# Altium PCB PCBA-2121-01.PcbDoc (part 1 of 2)
Units mil, origin at the board's own origin, x right, y up, seen from the top; angles counter-clockwise.
Board outline 748.03 x 2362.2 mil, 4 copper layers (L1, L2, L3, L4), stack 62.192 mil thick; 80 components, 54 nets, 287 pads, 217 vias.
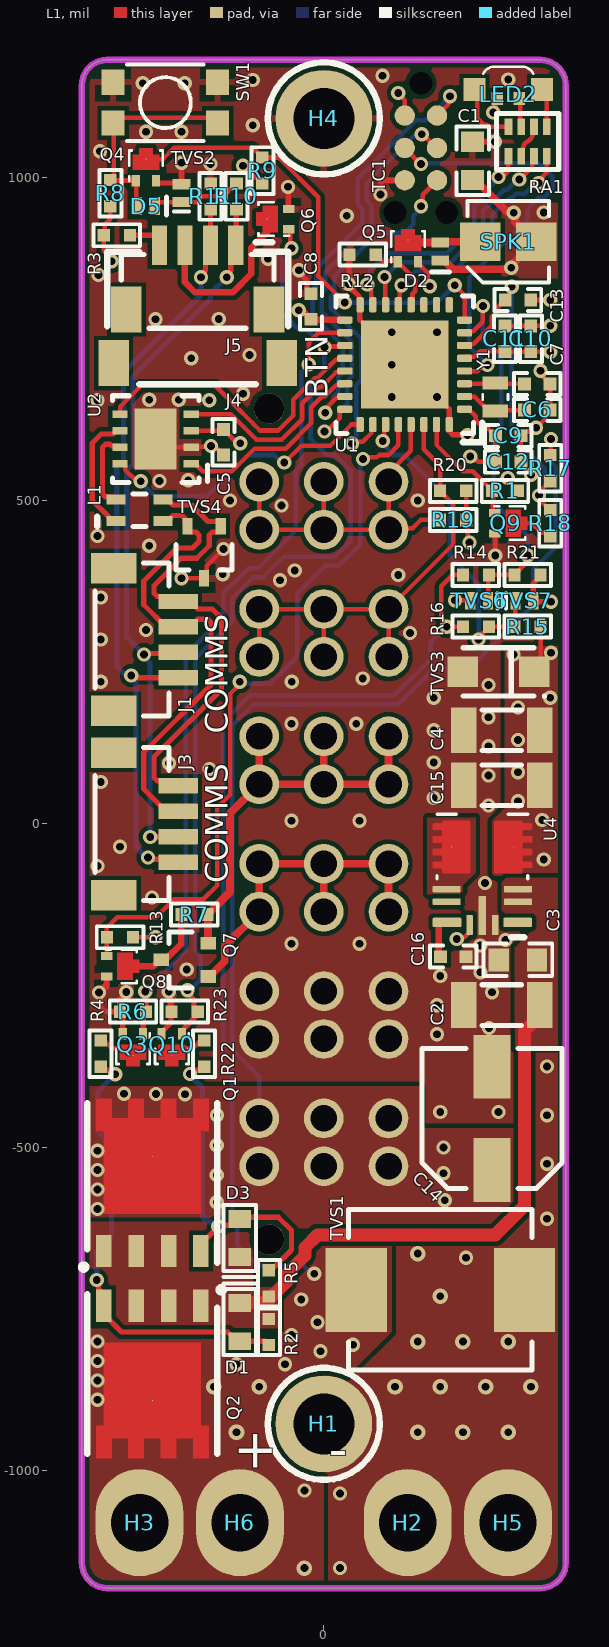
[diagram p0: L1 view]
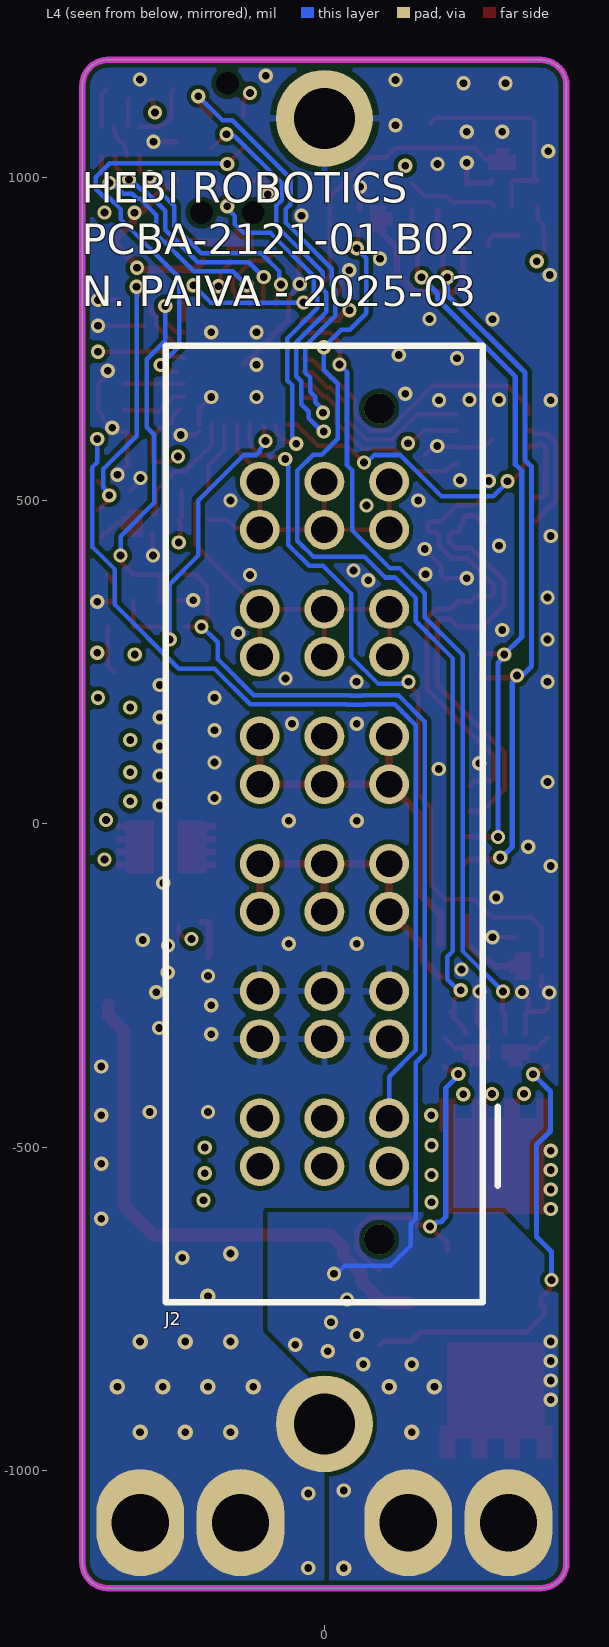
[diagram p1: L4 view, seen from below]
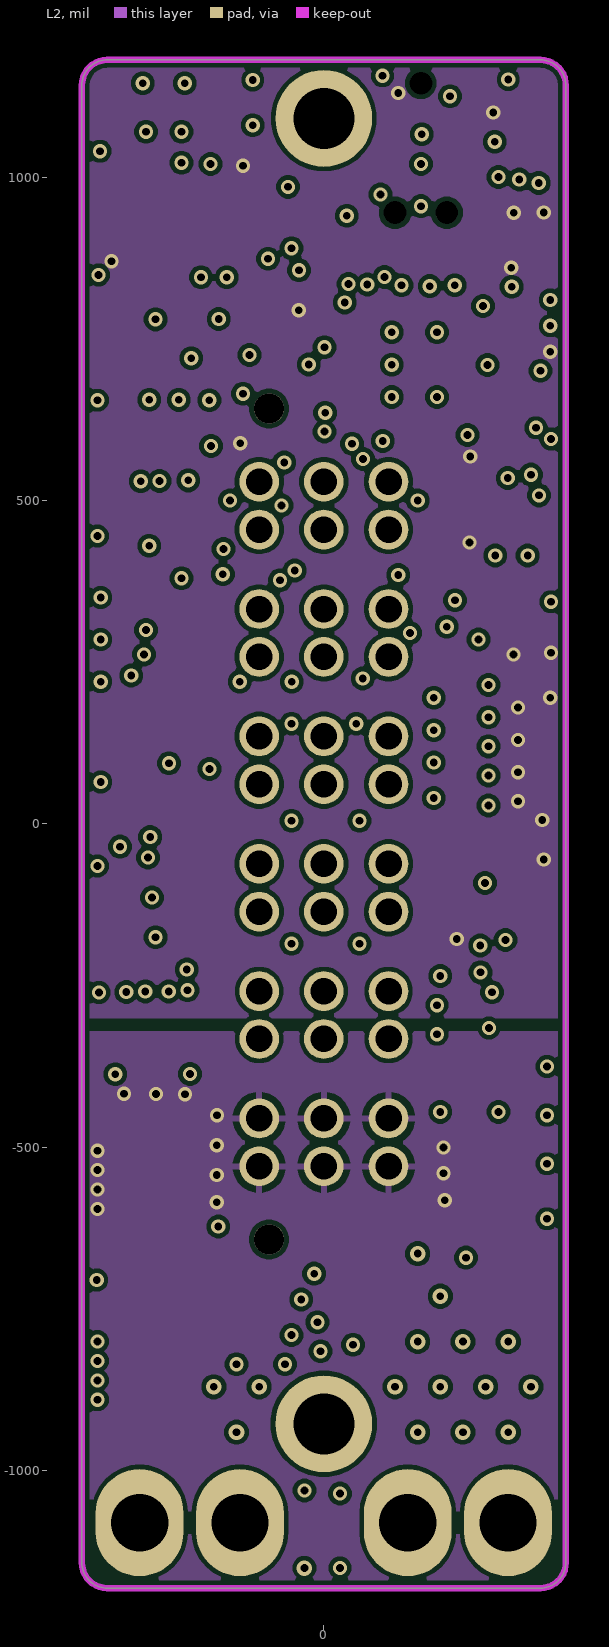
[diagram p2: L2]
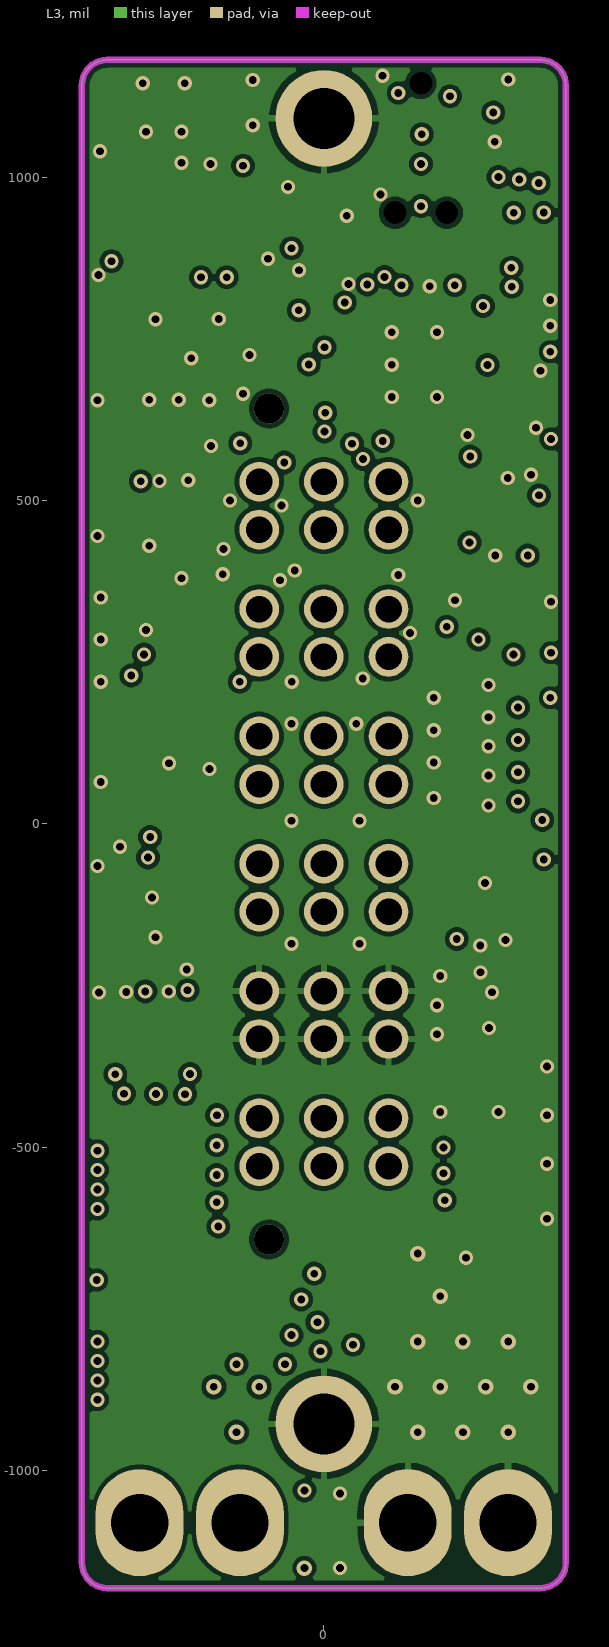
[diagram p3: L3]
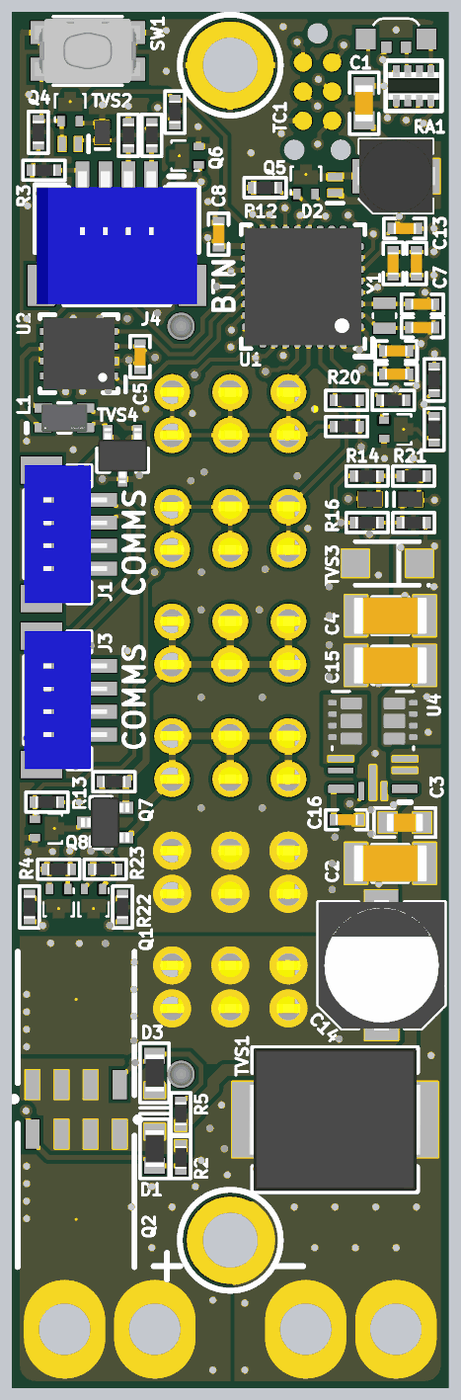
[diagram p5: 3D render of the assembled board from above, using the file's embedded part models]

## Layer stack, top to bottom
Top Solder: solder mask 0.4, Solder Resist, Dk 3.5
L1: signal copper 1.7
Dielectric 1: prepreg 2.8, PP-006, Dk 4.1
L2: signal copper 1.378
Dielectric 4: core 50.4362, Dk 4.2
L3: signal copper 1.378
Dielectric 2: prepreg 2.8, PP-006, Dk 4.1
L4: signal copper 1.7
Bottom Solder: solder mask 0.4, Solder Resist, Dk 3.5

## Board outline
-374.02,-1141.73 ccw(c-334.65,-1141.73) -334.65,-1181.1 334.65,-1181.1 ccw(c334.65,-1141.73) 374.02,-1141.73 374.02,1141.73 ccw(c334.65,1141.73) 334.65,1181.1 -334.65,1181.1 ccw(c-334.65,1141.73) -374.02,1141.73

## Design rules (kind name [scope] priority, off if disabled: settings)
Clearance [All] p1: gap=7 ignorepadtopadclearanceinfootprint=FALSE
ComponentClearance NO_BOM [IsNoBOMComponent] p1: gap=0 collisioncheckmode=3 verticalgap=0 showdistances=FALSE donotcheckwithout3dbody=TRUE
ComponentClearance ComponentClearance_1 [InComponent('J4') vs InComponent('J5')] p2: gap=-1 collisioncheckmode=3 verticalgap=-1 showdistances=FALSE
ComponentClearance [All] p3: gap=10 collisioncheckmode=3 verticalgap=10 showdistances=FALSE
DiffPairsRouting [All] p1: maxlimit=10 minlimit=8 mostfreqgap=8 toplayer_minwidth=7 toplayer_maxwidth=15 toplayer_prefwidth=7 midlayer1_minwidth=7 midlayer1_maxwidth=15 midlayer1_prefwidth=7 midlayer2_minwidth=7 midlayer2_maxwidth=15 midlayer2_prefwidth=7 bottomlayer_minwidth=7 bottomlayer_maxwidth=15 bottomlayer_prefwidth=7 maxuncoupledlength=500
Height [All] p1: minheight=0 maxheight=2000 prefheight=500
HoleSize [All] p1: absolutevalues=TRUE maxlimit=1000 minlimit=1 maxpercent=80.000 minpercent=20.000
HoleToHoleClearance HoleToHoleClearance_1 [HasFootprint('PJ-037A') vs HasFootprint('PJ-037A')] p1: gap=0 allowstackedmicrovias=TRUE
HoleToHoleClearance [All] p2: gap=10 allowstackedmicrovias=TRUE
MinimumSolderMaskSliver [All] p1 off: minsoldermaskwidth=10
PolygonConnect PolygonConnect_1 [All vs IsNamedPolygon('NO_THERMAL')] p1: connectstyle=Direct reliefconductorwidth=10 reliefentries=4 polygonreliefangle="90 Angle" airgapwidth=10
PolygonConnect [All] p2: thpad.connectstyle=Relief thpad.reliefconductorwidth=10 thpad.reliefentries=4 thpad.polygonreliefangle="90 Angle" thpad.airgapwidth=10 smdpad.connectstyle=Relief smdpad.reliefconductorwidth=10 smdpad.reliefentries=4 smdpad.polygonreliefangle="90 Angle" smdpad.airgapwidth=10 via.connectstyle=Direct via.reliefconductorwidth=10 via.reliefentries=4 via.polygonreliefangle="90 Angle" via.airgapwidth=10
RoutingVias [All] p1: holewidth=12 width=22 viastyle="Through Hole" minholewidth=12 minwidth=22 maxholewidth=40 maxwidth=100
SilkToSilkClearance [All] p1 off: silktosilkclearance=10
SilkToSolderMaskClearance [IsPad] p1 off: minsilkscreentomaskgap=10 clearancetoexposedcopper=TRUE
SolderMaskExpansion "Via Tenting" [IsVia] p1: expansion=2 istentingtop=TRUE
SolderMaskExpansion SolderMaskExpansion_1 [All] p2: expansion=2 istentingtop=FALSE
SupplyNets "Schematic Supply Nets_1" [InNet('VEXT')] p1: voltage=0.000
SupplyNets "Schematic Supply Nets" [InNet('VBAT_MID')] p2: voltage=0.000
SupplyNets "Schematic Supply Nets_5" [InNet('VBAT')] p3: voltage=0.000
SupplyNets "Schematic Supply Nets_4" [InNet('3V3')] p4: voltage=0.000
SupplyNets "Schematic Supply Nets_3" [InNet('GND')] p5: voltage=0.000
Width [All] p1: maxlimit=200 minlimit=7 preferedwidth=8
22 further rules are at their usual default settings.

## Classes and differential pairs
differential pair CAN_B: +CAN_B_P -CAN_B_N
differential pair CAN: +CAN_P -CAN_N

## Components (designator, comment, footprint, x,y, rotation, side; value= is the part's Value field where it differs from the comment)
C1 "C-10uf-X5R-16V-10%-0603" C0603 230,1025 r90 top
C2 "C-2.2uf-X7R-100V-10%-1206" C1206 275,-280 r0 top
C3 "C-0.1uf-X7R-100V-10%-0603" C0603 300,-210 r0 top
C4 "C-22uf-X5R-25V-20%-1206" C1206 275,145 r0 top
C5 "C-0.1uf-X7R-25V-10%-0402" C0402 -155,590 r90 top
C6 "C-9pf-NP0-50V-0.1pF-0402" C0402 330,640 r180 top
C7 "C-9pf-NP0-50V-0.1pF-0402" C0402 330,680 r180 top
C8 "C-0.1uf-X7R-25V-10%-0402" C0402 -20,800 r270 top
C9 "C-0.1uf-X7R-25V-10%-0402" C0402 285,600 r180 top
C10 "C-0.1uf-X7R-25V-10%-0402" C0402 320,750 r270 top
C11 "C-10000pf-X7R-50V-10%-0402" C0402 280,750 r270 top
C12 "C-1uf-X5R-25V-10%-0402" C0402 285,560 r0 top
C13 "C-10000pf-X7R-50V-10%-0402" C0402 300,810 r0 top
C14 "UCM1H220MCL1GS" CAPAE5753X61L 260,-455 r90 top
C15 "C-22uf-X5R-25V-20%-1206" C1206 275,60 r0 top
C16 "C-1uf-X5R-25V-10%-0402" C0402 200,-205 r180 top
D1 "CZRU52C10" CZRU52C10 -130,-770 r270 top
D2 "SBR05U20LP-7" DFN1006-2_DIODES 180,885 r90 top
D3 "CZRU52C10" CZRU52C10 -130,-640 r90 top
D5 "SBR05U20LP-7" DFN1006-2_DIODES -275,955 r180 top
H1 "M2-PLATED" M2-PLATED-NORMAL 0,-927.17 r0 top
H2 "PAD-AWG-12-WIDE" AWG-12-With-Wire 129.68,-1080 r180 top
H3 "PAD-AWG-12-WIDE" AWG-12-With-Wire -284.68,-1080 r180 top
H4 "M2-PLATED" M2-PLATED-NORMAL 0,1090.55 r0 top
H5 "PAD-AWG-12-WIDE" AWG-12-With-Wire 284.68,-1080 r180 top
H6 "PAD-AWG-12-WIDE" AWG-12-With-Wire -129.68,-1080 r180 top
J1 "BM04B-SRSS-TB(LF)(SN)" BM04B-SRSS-TB -275,285 r90 top
J2 "MPT-06-6.30-01-T-V" MPT-06-6.30-01-T-V-Footprint-1 0,0 r90 bottom locked
J3 "BM04B-SRSS-TB(LF)(SN)" BM04B-SRSS-TB -275,0 r90 top
J4 "04FMN-SMT-A-TF(LF)(SN)" 04FMN-SMT-A-TF(LF)(SN)-Footprint-1 -195,795 r180 top
J5 "BM04B-SRSS-TB(LF)(SN)" BM04B-SRSS-TB -195,845 r180 top
L1 "SRF2012-900YA" FP-SRF2012A-MFG -285,485 r0 top
LED2 "HSMF-C115" HSMF-C115 285,1135 r0 top
Q1 "FDMS86163P" FDMS86300DC -265,-554.88 r0 top
Q2 "FDMS86163P" FDMS86300DC -265,-850 r180 top
Q3 "DMN62D0LFD-7" DMN62D0LFD-7-Footprint-1 -295,-345 r180 top
Q4 "DMN62D0LFD-7" DMN62D0LFD-7-Footprint-1 -275,1015 r0 top
Q5 "DMN62D0LFD-7" DMN62D0LFD-7-Footprint-1 130,890 r0 top
Q6 "DMN62D0LFD-7" DMN62D0LFD-7-Footprint-1 -75,935 r90 top
Q7 "2SK880GRTE85LF" SOT65P205X100-3L -215,-210 r180 top
Q8 "DMN62D0LFD-7" DMN62D0LFD-7-Footprint-1 -315,-220 r270 top
Q9 "DMN62D0LFD-7" DMN62D0LFD-7-Footprint-1 285,465 r270 top
Q10 "DMN62D0LFD-7" DMN62D0LFD-7-Footprint-1 -235,-345 r180 top
R1 "R-10k-1%-0.063w-0402" R0402 280,515 r0 top
R2 "R-100k-1%-0.063w-0402" R0402 -85,-785 r270 top
R3 "R-470-1%-0.063w-0402" R0402 -320,910 r0 top
R4 "R-200k-1%-0.063w-0402" R0402 -345,-355 r270 top
R5 "R-100k-1%-0.063w-0402" R0402 -85,-710 r90 top
R6 "R-10k-1%-0.063w-0402" R0402 -295,-290 r0 top
R7 "R-3.3M-1%-0.063w-0402" R0402 -200,-140 r0 top
R8 "R-200k-1%-0.063w-0402" R0402 -330,975 r270 top
R9 "R-1M-1%-0.063w-0402" R0402 -95,1010 r270 top
R10 "R-10k-1%-0.063w-0402" R0402 -135,970 r90 top
R11 "R-10k-1%-0.063w-0402" R0402 -175,970 r90 top
R12 "R-100k-1%-0.063w-0402" R0402 60,880 r0 top
R13 "R-10k-1%-0.063w-0402" R0402 -315,-175 r0 top
R14 "R-84.5k-1%-0.063w-0402" R0402 235,385 r180 top
R15 "R-100k-1%-0.063w-0402" R0402 315,305 r0 top
R16 "R-100k-1%-0.063w-0402" R0402 235,305 r0 top
R17 "R-3.3M-1%-0.063w-0402" R0402 350,550 r90 top
R18 "R-200k-1%-0.063w-0402" R0402 350,465 r90 top
R19 "R-2.55k-1%-0.063w-0402" R0402 200,470 r180 top
R20 "R-2.55k-1%-0.063w-0402" R0402 200,515 r180 top
R21 "R-2.55k-1%-0.063w-0402" R0402 315,385 r180 top
R22 "R-200k-1%-0.063w-0402" R0402 -185,-355 r270 top
R23 "R-10k-1%-0.063w-0402" R0402 -215,-290 r0 top
RA1 "RA-4-C-100-5%-0.063w-0804" 741C083 315,1055 r270 top
SPK1 "SMT-0340-T-R" SMT-0340-T-R 285,900 r90 top
SW1 "KMR631NG ULC LFS" KMR6_CK -245,1115 r0 top
TC1 "CMP-694-0001-1" TC2030-MCP-NL_SMALL 150,1045 r270 top
TVS1 "5.0SMDJ43CA" DIOM6959X26L 180,-720 r180 top
TVS2 "D3V3H1U2LP-7B" DFN70P101X53-2N -220,975 r90 top
TVS3 "PTVS3V3S1UR,115" SOD-123W_NXP 270,235 r180 top
TVS4 "ESD2CAN24DCKRQ1" SOT65P210X90-3L -185,420 r270 top
TVS6 "D3V3H1U2LP-7B" DFN70P101X53-2N 240,345 r180 top
TVS7 "D3V3H1U2LP-7B" DFN70P101X53-2N 310,345 r0 top
U1 "STM32L432KCU6" QFN50P500X500X60_HS-33L 125,710 r180 top
U2 "TCAN3414DRBR" SON65P300X100_HS-9L -260,595 r180 top
U4 "TPSM365R6V3RDNR" TPSM365R6V3RDNR-Footprint-1 245,-75 r180 top
Y1 "ABS05-32.768KHZ-9-T" ABS05-32.768KHZ-9-T-Footprint-1 265,660 r90 top

## Footprints (in the part's own frame and the unit in brackets; to place one, negate y for a bottom-side part, rotate by r counter-clockwise, add the part's x,y. Pads: shape width x height; smd on the part's side, far side on the other; paste and mask are expansions set on the pad)
04FMN-SMT-A-TF(LF)(SN)-Footprint-1 [mm]
  rect 0.6x1.2 smd: 1(-1.5,-2.4) 2(-0.5,-2.4) 3(0.5,-2.4) 4(1.5,-2.4)
  rect 1.2x1.8 smd: PAD(-3.3,2.1) PAD(3.3,2.1)
  silkscreen extent -3.56,-2.65 3.56,2.93, body extent -3.5,-2.88 3.5,2.92, height 3.04
741C083 [mm] "CTS 741 0804 quad resistor pack 2.0x1.0mm .5mm height"
  rect 0.65x0.3 smd: 1(-0.575,0.75) 2(-0.575,0.25) 3(-0.575,-0.25) 4(-0.575,-0.75) 5(0.575,-0.75) 6(0.575,-0.25) 7(0.575,0.25) 8(0.575,0.75)
  silkscreen extent -1.1,-1.22 1.1,1.22, body extent -0.65,-1.1 0.65,1.1, height 0.5
ABS05-32.768KHZ-9-T-Footprint-1 [mm]
  rect 0.5x1 smd: 1(-0.55,0) 2(0.55,0)
  silkscreen extent -0.1,-0.5 0.1,0.5, body extent -0.8,-0.5 0.8,0.5, height 0.5
AWG-12-With-Wire [mm] "IPC-2222-B"
  oval 3.45x4.2 hole 2.25: HOLE(0,0)
  body extent -1.7,-1.7 1.7,1.7, height 25.4
BM04B-SRSS-TB [mm] "JST SH 4 pin TOP entry"
  rect 1.2x1.8 smd: 0(-2.8,1.263) 0(2.8,1.263)
  rect 0.6x1.55 smd: 1(-1.5,-1.262) 2(-0.5,-1.262) 3(0.5,-1.262) 4(1.5,-1.262)
  silkscreen extent -3,-0.9 3,2, body extent -3,-1.6 3,2, height 4.3
C0402 [mm] "Generic 0402 Capacitor"
  rect 0.5x0.5 smd: 1(-0.5,0) 2(0.5,0)
  silkscreen extent -0.91,-0.43 0.91,0.43, body extent -0.5,-0.25 0.5,0.25, height 0.55
C0603 [mm] "Generic 0603 Capacitor"
  rect 0.8x0.9 smd: 1(-0.75,0) 2(0.75,0)
  silkscreen extent -1.35,-0.64 1.35,0.64, body extent -0.8,-0.4 0.8,0.4, height 0.9
C1206 [mm] "Generic 1206 Capacitor"
  rect 1x1.8 smd: 1(-1.5,0) 2(1.5,0)
  silkscreen extent -0.77,-0.8 0.77,0.8, body extent -1.6,-0.8 1.6,0.8, height 1.8
CAPAE5753X61L [mm] "Aluminum Electrolytic Capacitor, Body 5.30x5.30x6.10mm, IPC High Density"
  rect 2.5x1.45 smd: +(-2.025,0) -(2.025,0)
  silkscreen extent -2.75,-2.75 2.75,2.75, body extent -2.85,-2.75 2.85,2.75, height 6.1
CZRU52C10 [mm]
  rect 0.7x0.9 smd: A(0.75,0) C(-0.75,0)
  silkscreen extent -1.52,-0.64 1.3,0.64, body extent -0.8,-0.4 0.8,0.4, height 0.55
DFN70P101X53-2N [mm] "DFN, 2-Leads, Body 0.61x1.01mm, Pitch 0.70mm, IPC Medium Density"
  rect 0.4x0.7 smd paste-0.041: A(0.35,0) C(-0.35,0)
  silkscreen extent -0.72,-0.3 -0.72,0.3, body extent -0.54,-0.34 0.54,0.34, height 0.53
DFN1006-2_DIODES [mm] "DFN1006-2 from DIODES INC"
  rect 0.4x0.7 smd paste-0.041: A(0.35,0) C(-0.35,0)
  silkscreen extent -0.8,-0.35 -0.8,0.35, body extent -0.54,-0.34 0.54,0.34, height 0.53
DIOM6959X26L [mm] "Molded Diode, 2-Leads, Body 6.86x5.91mm, IPC High Density"
  rect 2.4x3.3 smd: A(3.3,0) C(-3.3,0)
  silkscreen extent -3.6,-3.15 3.6,3.15, body extent -3.77,-3.11 3.77,3.11, height 2.62
DMN62D0LFD-7-Footprint-1 [mm]
  round 0.025 smd: D(0,0.325)
  rect 0.32x0.45 smd mask+0.102: G(-0.4,-0.53)
  rect 0.32x0.45 smd: S(0.4,-0.525)
  L1 region: -0.525,-0.1 -0.525,0.5 -0.26,0.5 -0.26,0.75 0.26,0.75 0.26,0.5 0.525,0.5 0.525,-0.1
  silkscreen extent -0.66,-0.55 0.66,0.66, body extent -0.6,-0.6 0.6,0.6, height 0.5
FDMS86300DC [mm] "FDMS86300DC N-Channel Dual Cool PowerTrench MOSFET from Fairchild"
  round 0.025 smd: D(0,1.045)
  rect 0.61x1.27 smd: G(1.905,-2.67) S(-1.905,-2.67) S(-0.635,-2.67) S(0.635,-2.67)
  L1 region: -2.21,3.305 -1.6,3.305 -1.6,2.535 -0.94,2.535 -0.94,3.305 -0.33,3.305 -0.33,2.535 0.33,2.535 0.33,3.305 0.94,3.305 0.94,2.535 1.6,2.535 1.6,3.305 2.21,3.305 2.21,2.035 1.905,2.035 1.905,-1.215 -1.905,-1.215 -1.905,2.035 -2.21,2.035
  silkscreen extent -2.8,-3.4 2.55,3.13, body extent -2.55,-3.13 2.55,3.13, height 1.05
FP-SRF2012A-MFG [mm]
  rect 0.75x0.4 smd: 1(-0.925,-0.425) 2(-0.925,0.425) 3(0.925,0.425) 4(0.925,-0.425)
  silkscreen extent -1.65,-0.64 0.25,0.64, body extent -1.4,-0.8 1.4,0.8, height 0.25
HSMF-C115 [mm] "HSMF-C115 LED CHIP RGB"
  rect 0.85x0.9 smd: 1(-1.325,0) 4(1.325,0)
  rect 0.45x0.5 smd: 2(-0.425,-0.35) 3(0.425,-0.35)
  silkscreen extent -0.99,0.62 0.99,0.9, body extent -1.25,-0.1 1.25,0.9, height 1
KMR6_CK [mm] "KMR 6 Series from C&K"
  rect 0.9x1 smd: 1(-2.05,0.8) 1(2.05,0.8) 2(-2.05,-0.8) 2(2.05,-0.8)
  silkscreen extent -1.5,-1.5 1.5,1.5, body extent -2.3,-1.4 2.3,1.4, height 1.92
M2-PLATED-NORMAL [mm]
  round 3.8 hole 2.4: HOLE(0,0)
  silkscreen extent -2.2,-2.2 2.2,2.2
MPT-06-6.30-01-T-V-Footprint-1 [mm] "Generic 0402 Capacitor"
  round 1.56 hole 1.04: 1(-13.44,-2.54) 1(-13.44,0) 1(-13.44,2.54) 1(-11.56,-2.54) 1(-11.56,0) 1(-11.56,2.54) 2(-8.44,-2.54) 2(-8.44,0) 2(-8.44,2.54) 2(-6.56,-2.54) 2(-6.56,0) 2(-6.56,2.54) 3(-3.44,-2.54) 3(-3.44,0) 3(-3.44,2.54) 3(-1.56,-2.54) 3(-1.56,0) 3(-1.56,2.54) 4(1.56,-2.54) 4(1.56,0) 4(1.56,2.54) 4(3.44,-2.54) 4(3.44,0) 4(3.44,2.54) 5(6.56,-2.54) 5(6.56,0) 5(6.56,2.54) 5(8.44,-2.54) 5(8.44,0) 5(8.44,2.54) 6(11.56,-2.54) 6(11.56,0) 6(11.56,2.54) 6(13.44,-2.54) 6(13.44,0) 6(13.44,2.54)
  round 1.19 hole 1.19 unplated: ""(-16.31,-2.15) ""(16.31,-2.15)
  silkscreen extent -18.77,-6.8 18.77,6.23, body extent -19.78,-6.22 19.78,6.23, height 11.5
QFN50P500X500X60_HS-33L [mm] "QFN, 32-Leads, Body 5.00x5.00mm, Pitch 0.50mm, Thermal Pad 3.50x3.50mm, IPC High Density"
  rrect50% 0.6x0.29 smd: 1(-2.35,1.75) 2(-2.35,1.25) 3(-2.35,0.75) 4(-2.35,0.25) 5(-2.35,-0.25) 6(-2.35,-0.75) 7(-2.35,-1.25) 8(-2.35,-1.75) 17(2.35,-1.75) 18(2.35,-1.25) 19(2.35,-0.75) 20(2.35,-0.25) 21(2.35,0.25) 22(2.35,0.75) 23(2.35,1.25) 24(2.35,1.75)
  rrect50% 0.29x0.6 smd: 9(-1.75,-2.35) 10(-1.25,-2.35) 11(-0.75,-2.35) 12(-0.25,-2.35) 13(0.25,-2.35) 14(0.75,-2.35) 15(1.25,-2.35) 16(1.75,-2.35) 25(1.75,2.35) 26(1.25,2.35) 27(0.75,2.35) 28(0.25,2.35) 29(-0.25,2.35) 30(-0.75,2.35) 31(-1.25,2.35) 32(-1.75,2.35)
  rect 3.45x3.45 smd: 33(0,0)
  silkscreen extent -3.05,-2.7 2.7,3.05, body extent -2.55,-2.55 2.55,2.55, height 0.6
R0402 [mm] "Generic 0402 Resistor"
  rect 0.475x0.5 smd: 1(-0.513,0) 2(0.513,0)
  silkscreen extent -0.91,-0.43 0.91,0.43, body extent -0.5,-0.25 0.5,0.25, height 0.4
SMT-0340-T-R [mm]
  rect 1.5x1.6 smd: 1(0,-1.1) 2(0,1.1)
  silkscreen extent -1.6,-1.6 1.6,1.6, body extent -1.6,-1.7 1.6,1.7, height 2
SOD-123W_NXP [mm] "1.7x2.6mm body flat bottomed diode package footprint based on http://www.nxp.com/documents/data_sheet/PTVSXS1UR_SER.pdf"
  rect 1.2x1.2 smd: A(1.4,0) C(-1.4,0)
  silkscreen extent -1.85,-0.95 1.4,1, body extent -1.4,-0.95 1.4,0.95, height 1.1
SON65P300X100_HS-9L [mm] "SON, 8-Leads, Body 3.00x3.00mm, Pitch 0.65mm, Thermal Pad 2.40x1.49mm, IPC High Density"
  rect 0.6x0.3 smd: 1(-1.4,0.975) 2(-1.4,0.325) 3(-1.4,-0.325) 4(-1.4,-0.975) 5(1.4,-0.975) 6(1.4,-0.325) 7(1.4,0.325) 8(1.4,0.975)
  rect 1.65x2.4 smd: 9(0,0)
  silkscreen extent -2.03,-1.7 1.7,1.7, body extent -1.55,-1.55 1.55,1.55, height 1
SOT65P205X100-3L [mm] "SOT23, 3-Leads, Body 2.00x2.05mm, Pitch 0.65mm, IPC High Density"
  rect 0.6x0.5 smd: D(-0.925,-0.65) G(0.925,0) S(-0.925,0.65)
  silkscreen extent -0.27,-1.1 0.63,1.1, body extent -1.05,-1.1 1.05,1.1, height 1
SOT65P210X90-3L [mm] "SOT23, 3-Leads, Body 2.00x2.10mm, Pitch 0.65mm, IPC High Density"
  rect 0.65x0.4 smd: 1(-1.025,0.65) 2(-1.025,-0.65) 3(1.025,0)
  silkscreen extent -0.3,-1.1 0.7,1.1, body extent -1.2,-1.07 1.2,1.07, height 0.9
TC2030-MCP-NL_SMALL [mm]
  round 0.8 smd paste-0.4: 1(-1.27,-0.635) 2(-1.27,0.635) 3(0,-0.635) 4(0,0.635) 5(1.27,-0.635) 6(1.27,0.635)
  round 0.85 hole 0.9 unplated mask+0: ""(-2.54,0) ""(2.54,1.016) ""(2.54,-1.016)
TPSM365R6V3RDNR-Footprint-1 [mm]
  rrect25% 1.125x0.37 smd: 1(-1.388,1.96) 8(1.388,1.96)
  rrect25% 1.1x0.25 smd: 2(-1.4,1.15) 3(-1.4,0.65) 6(1.4,0.65) 7(1.4,1.15)
  round 0.025 smd paste-2539.97: 4(-1.213,-1) 5(1.213,-1)
  rrect25% 0.25x0.8 smd: 9(0.5,2.06) 11(-0.5,2.06)
  rrect25% 0.3x1.54 smd: 10(0,1.69)
  L1 region: -0.475,-1.975 -0.479,-1.994 -0.49,-2.01 -0.506,-2.021 -0.525,-2.025 -0.525,-2.025 -1.525,-2.025 -1.544,-2.021 -1.56,-2.01 -1.571,-1.994 -1.575,-1.975 -1.575,-1.975 -1.575,-1.975 -1.579,-1.956 -1.59,-1.94 -1.606,-1.929 -1.625,-1.925 -1.625,-1.925 -1.9,-1.925 -1.919,-1.921 -1.935,-1.91 -1.946,-1.894 -1.95,-1.875 -1.95,-1.875 -1.95,-1.725 -1.946,-1.706 -1.935,-1.69 -1.919,-1.679 -1.9,-1.675 -1.9,-1.675 -1.625,-1.675 -1.606,-1.671 -1.59,-1.66 -1.579,-1.644 -1.575,-1.625 -1.575,-1.625 -1.575,-1.475 -1.579,-1.456 -1.59,-1.44 -1.606,-1.429 -1.625,-1.425 -1.625,-1.425 -1.9,-1.425 -1.919,-1.421 -1.935,-1.41 -1.946,-1.394 -1.95,-1.375 -1.95,-1.375 -1.95,-1.225 -1.946,-1.206 -1.935,-1.19 -1.919,-1.179 -1.9,-1.175 -1.9,-1.175 -1.625,-1.175 -1.606,-1.171 -1.59,-1.16 -1.579,-1.144 -1.575,-1.125 -1.575,-1.125 -1.575,-0.975 -1.579,-0.956 -1.59,-0.94 -1.606,-0.929 -1.625,-0.925 -1.625,-0.925 -1.9,-0.925 -1.919,-0.921 -1.935,-0.91 -1.946,-0.894 -1.95,-0.875 -1.95,-0.875 -1.95,-0.725 -1.946,-0.706 -1.935,-0.69 -1.919,-0.679 -1.9,-0.675 -1.9,-0.675 -1.625,-0.675 -1.606,-0.671 -1.59,-0.66 -1.579,-0.644 -1.575,-0.625 -1.575,-0.625 -1.575,-0.475 -1.579,-0.456 -1.59,-0.44 -1.606,-0.429 -1.625,-0.425 -1.625,-0.425 -1.9,-0.425 -1.919,-0.421 -1.935,-0.41 -1.946,-0.394 -1.95,-0.375 -1.95,-0.375 -1.95,-0.225 -1.946,-0.206 -1.935,-0.19 -1.919,-0.179 -1.9,-0.175 -1.9,-0.175 -1.625,-0.175 -1.606,-0.171 -1.59,-0.16 -1.579,-0.144 -1.575,-0.125 -1.575,-0.125 -1.575,-0.025 -1.571,-0.006 -1.56,0.01 -1.544,0.021 -1.525,0.025 -1.525,0.025 -0.525,0.025 -0.506,0.021 -0.49,0.01 -0.479,-0.006 -0.475,-0.025 -0.475,-0.025
  L1 region: 0.475,-1.975 0.479,-1.994 0.49,-2.01 0.506,-2.021 0.525,-2.025 0.525,-2.025 1.525,-2.025 1.544,-2.021 1.56,-2.01 1.571,-1.994 1.575,-1.975 1.575,-1.975 1.575,-1.975 1.579,-1.956 1.59,-1.94 1.606,-1.929 1.625,-1.925 1.625,-1.925 1.9,-1.925 1.919,-1.921 1.935,-1.91 1.946,-1.894 1.95,-1.875 1.95,-1.875 1.95,-1.725 1.946,-1.706 1.935,-1.69 1.919,-1.679 1.9,-1.675 1.9,-1.675 1.625,-1.675 1.606,-1.671 1.59,-1.66 1.579,-1.644 1.575,-1.625 1.575,-1.625 1.575,-1.475 1.579,-1.456 1.59,-1.44 1.606,-1.429 1.625,-1.425 1.625,-1.425 1.9,-1.425 1.919,-1.421 1.935,-1.41 1.946,-1.394 1.95,-1.375 1.95,-1.375 1.95,-1.225 1.946,-1.206 1.935,-1.19 1.919,-1.179 1.9,-1.175 1.9,-1.175 1.625,-1.175 1.606,-1.171 1.59,-1.16 1.579,-1.144 1.575,-1.125 1.575,-1.125 1.575,-0.975 1.579,-0.956 1.59,-0.94 1.606,-0.929 1.625,-0.925 1.625,-0.925 1.9,-0.925 1.919,-0.921 1.935,-0.91 1.946,-0.894 1.95,-0.875 1.95,-0.875 1.95,-0.725 1.946,-0.706 1.935,-0.69 1.919,-0.679 1.9,-0.675 1.9,-0.675 1.625,-0.675 1.606,-0.671 1.59,-0.66 1.579,-0.644 1.575,-0.625 1.575,-0.625 1.575,-0.475 1.579,-0.456 1.59,-0.44 1.606,-0.429 1.625,-0.425 1.625,-0.425 1.9,-0.425 1.919,-0.421 1.935,-0.41 1.946,-0.394 1.95,-0.375 1.95,-0.375 1.95,-0.225 1.946,-0.206 1.935,-0.19 1.919,-0.179 1.9,-0.175 1.9,-0.175 1.625,-0.175 1.606,-0.171 1.59,-0.16 1.579,-0.144 1.575,-0.125 1.575,-0.125 1.575,-0.025 1.571,-0.006 1.56,0.01 1.544,0.021 1.525,0.025 1.525,0.025 0.525,0.025 0.506,0.021 0.49,0.01 0.479,-0.006 0.475,-0.025 0.475,-0.025
  silkscreen extent -1.78,-2.29 1.78,2.54, body extent -1.75,-2.25 1.75,2.25, height 2.1

## Part data
C1: library part CMP-00102-2, "Capacitor Ceramic 10uF 16V X5R 10% SMD 0603", Capacitance=10uF, Operating Temperature="-55°C ~ 85°C", Package / Case=0603, Temperature Coefficient=X5R, Tolerance=10%, Voltage - Rated=16V
C2: library part CMP-01086-1, "Capacitor Ceramic 2.2uF 100V X7R 10% SMD 1206", Capacitance=2.2uF, Operating Temperature="-55°C ~ 125°C", Package / Case=1206, Temperature Coefficient=X7R, Tolerance=±10%, Voltage - Rated=100V
C3: library part C-0.1uf-X7R-100V-20%-0603-6, "Capacitor Ceramic 0.1uF 100V X7R 10% SMD 0603", Capacitance=0.1uF, Operating Temperature="-55°C ~ 125°C", Package / Case=0603, Temperature Coefficient=X7R, Tolerance=±10%, Voltage - Rated=100V
C4 C15: library part CMP-00094-2, "Capacitor Ceramic 22uF 25V X5R 20% SMD 1206", Capacitance=22uF, Operating Temperature="-55°C ~ 85°C", Package / Case=1206, Temperature Coefficient=X5R, Tolerance=20%, Voltage - Rated=25V
C5 C8 C9 C10: library part CMP-00040-11, "Capacitor Ceramic 0.1uF 25V X7R 10% SMD 0402", Capacitance=0.1uF, Operating Temperature="-55°C ~ 125°C", Package / Case=0402, Temperature Coefficient=X7R, Tolerance=10%, Voltage - Rated=25V
C6 C7: library part CMP-01105-1, "Capacitor Ceramic 9pF 50V NP0 ±0.1pF SMD 0402", Capacitance=9pF, Operating Temperature="-55°C ~ 125°C", Package / Case=0402, Temperature Coefficient="C0G, NP0", Tolerance=±0.1pF, Voltage - Rated=50V
C11 C13: library part CMP-00041-8, "Capacitor Ceramic 10000pF 50V X7R 10% SMD 0402", Capacitance=10000pF, Operating Temperature="-55°C ~ 125°C", Package / Case=0402, Temperature Coefficient=X7R, Tolerance=10%, Voltage - Rated=50V
C12 C16: library part C-1uf-X5R-25V-10%-0402-8, "Capacitor Ceramic 1uF 25V X5R 10% SMD 0402", Capacitance=1uF, Operating Temperature="-55°C ~ 85°C", Package / Case=0402, Temperature Coefficient=X5R, Tolerance=±10%, Voltage - Rated=25V
C14: library part CMP-01106-1, "CAP ALUM 22UF 20% 50V SMD", Capacitance=22uF, Capacitor Type=Aluminium, Tolerance=20%, Voltage=50V
D1 D3: library part CMP-00843-2, "DIODE ZENER 10V 150MW 0603", Max Operating Temperature=125°C, Max Power Dissipation=150mW, Min Operating Temperature=-55°C, Package Body Material=Plastic, Package Shape=Rectangular, Package Style="SMALL OUTLINEMeter", Peak Reflow Temperature (Cel)=260°C, Reference Voltage-Nom=10V, Test Current=5mA, Time @ Peak Reflow Temperature-Max (s)=30s, Voltage Tol-Max=5%, Diode Element Material=SILICON, Diode Type=ZENER, JESD-609 Code=e4, Number of Elements=1, Number of Terminals/Pins=2, Polarity=Unidirectional, REACH SVHC=Yes, RoHS Compliant=Yes, Surface Mount=Yes, Technology=ZENER, Terminal Finish=Gold, Terminal Form="No Lead", Terminal Position=DUAL
D2 D5: library part CMP-698-0003-3, "DIODE SBR 20V 500MA 2DFN", Capacitance @ Vr, F=-, Current - Average Rectified (Io)=500mA, Current - Reverse Leakage @ Vr="50µA @ 20V", Operating Temperature - Junction="-65°C ~ 150°C", Package / Case=2-UFDFN, Supplier Device Package="2-DFN1006 (1.0x0.6)", Voltage - DC Reverse (Vr) (Max)=20V, Voltage - Forward (Vf) (Max) @ If="500mV @ 500mA", Category="Discrete Semiconductor Products", ComponentLink1Description=Datasheet, ComponentLink1URL=http://www.diodes.com/datasheets/SBR05U20LP.pdf, Diode Type="Super Barrier", Lead Free Status / RoHS Status="RoHS Compliant", Mounting Type="Surface Mount", Reverse Recovery Time (trr)=-, Speed="Fast Recovery =< 500ns, > 200mA (Io)"
H1 H4: library part CMP-00782-1, "M2 Size Screw Hole, Normal Fit, Plated", Size=M2
H2 H3 H5 H6: library part CMP-01047-1, "AWG 12 Hole with Wider Pad", Size=AWG12
J1 J3 J5: library part CMP-00286-2, "CONN HEADER SH 4POS TOP 1MM TIN", Color=Natural, Manufacturer="JST Sales America Inc", Category="Connectors, Interconnects", ComponentLink1Description=Datasheet, ComponentLink1URL=http://www.jst-mfg.com/product/pdf/eng/eSH.pdf, Connector Type="Header, Shrouded", Contact Finish=Tin, Contact Finish Thickness=-, Contact Mating Length=-, Contact Type="Male Pin", Fastening Type=-, Features="Solder Retention", Lead Free Status / RoHS Status="RoHS Compliant", Manufacturer Part Number=BM04B-SRSS-TB(LF)(SN), Mounting Type="Surface Mount", Number of Positions=4, Number of Positions Loaded=All, Number of Rows=1, Pitch="0.039\" (1.00mm)", Row Spacing=-, Termination=Solder
J2: library part CMP-00921-2, "5.00 MM POWERSTRIP/30 A DUAL BL", Color=Black, Max Operating Temperature=105°C, Min Operating Temperature=-55°C, Voltage Rating=812V, Contact Material="Copper Alloy", Contact Plating=Tin, Depth=12.45mm, Fastening Type=Ramp, Gender=Male, Housing Material=Polymer, Insulation Material=Polymer, Length=37.55mm, Mount="Through Hole", Number of Contacts=6, Number of Pins=36, Number of Ports=1, Number of Positions=6, Number of Rows=1, Number of Terminals/Pins=36, Orientation=Straight, Packaging=Tray, Radiation Hardening=No, RoHS Compliant=Yes, Series="PowerStrip™ 30 MPT", Termination=Solder
J4: library part CMP-1199-000014-1, "Ffc / Fpc Board Connector, Fmn Series, Surface Mount, Receptacle, 4, 1 Mm Rohs Compliant: Yes", Max Current Rating=500mA, Max Operating Temperature=85°C, Max Voltage Rating (DC)=50V, Min Operating Temperature=-25°C, Mounting Technology="Surface Mount", Number of Positions=4, Orientation="Right Angle", Pitch=1mm
L1: library part CMP-01087-1, "CMC 400MA 2LN 90 OHM SMD", Current Rating=400mA, DC Resistance-Max=300mR, Max Operating Temperature=125°C, Min Operating Temperature=-40°C, Voltage Rating=50V, Filter Type="DATA LINE FILTER", Height=1.2mm, Length=2mm, Mounting Technology="Surface Mount", Output Impedance=90R, Reach SVHC Compliant=Yes, RoHS Compliant=Yes, Width=1.2mm
LED2: library part CMP-00909-1, "LED RGB DIFFUSED CHIP SMD R/A", Case/Package=SMD/SMT, Color=Blue,Green,Red, Forward Current=20mA, Forward Voltage=3.4V, Lens Color=White, Max Operating Temperature=85°C, Min Operating Temperature=-40°C, Package Quantity=3000, Power Rating=78mW, Reverse Voltage=5V, Contact Plating=Gold, Depth=1mm, Dominant Wavelength=470nm, Height=1mm, Lead Free="Lead Free", Length=2.5mm, Lens Style=Diffused,Dome,Colorless,Rectangular, Lens Transparency=Diffused, Luminous Intensity=60mcd, Mount="Surface Mount", Number of Elements=3, Number of LEDs=3, Number of Pins=4, Packaging="Tape and Reel", Radiation Hardening=No, REACH SVHC="No SVHC", RoHS Compliant=Yes, Series=-, Test Current=20mA, Viewing Angle=125°, Wavelength=470nm, Width=1mm
Q1 Q2: library part CMP-00940-2, "MOSFET P-CH 100V 7.9A POWER56", Continuous Drain Current (ID)=-50A, Drain to Source Resistance=22mR, Drain to Source Voltage (Vdss)=-100V, Gate to Source Voltage (Vgs)=25V, Max Operating Temperature=150°C, Max Power Dissipation=104W, Min Operating Temperature=-55°C, Threshold Voltage=-2.8V, Element Configuration=Single, Height=1.05mm, Length=5mm, Rds On Max=22mR, Width=5.85mm
Q3 Q4 Q5 Q6 Q8 Q9 Q10: library part CMP-01107-2, "MOSFET N-CH 60V 310MA 3DFN"
Q7: library part CMP-01103-1, "JFET N-CH 50V SC70"
R1 R6 R10 R11 R13 R23: library part CMP-00015-10, "Resistor 0402 10k Ohm 1% 1-16 Watt", Package=0402, Power="0.063W, 1/16W", Resistance=10k, Tolerance=1%
R2 R5 R12 R15 R16: library part CMP-00014-5, "Resistor 0402 100k Ohm 1% 1-16 Watt", Package=0402, Power="0.063W, 1/16W", Resistance=100k, Tolerance=1%
R3: library part CMP-00097-2, "Resistor 0402 470 Ohm 1% 1-16 Watt", Package=0402, Power="0.063W, 1/16W", Resistance=470, Tolerance=1%
R4 R8 R18 R22: library part CMP-00010-6, "Resistor 0402 200k Ohm 1% 1-16 Watt", Package=0402, Power="0.063W, 1/16W", Resistance=200k, Tolerance=1%
R7 R17: library part CMP-00141-5, "Resistor 0402 3.3M Ohm 1% 1-16 Watt", Package / Case=0402, Power="0.063W, 1/16W", Resistance=3.3M, Tolerance (%)=±1%
R9: library part CMP-00025-6, "Resistor 0402 1M Ohm 1% 1-16 Watt", Package=0402, Power="0.063W, 1/16W", Resistance=1M, Tolerance=1%
R14: library part CMP-00979-1, "Resistor 0402 84.5k Ohm 1% 1-16 Watt", Package / Case=0402, Part Name=R-82k-1%-0.063w-0402, Power="0.063W, 1/16W", Resistance=84.5k, Tolerance (%)=±1%
R19 R20 R21: library part CMP-00113-3, "Resistor 0402 2.55k Ohm 1% 1-16 Watt", Package / Case=0402, Power="0.063W, 1/16W", Resistance=2.55k, Tolerance (%)=±1%, Part Name=R-2.55k-1%-0.063w-0402
RA1: library part CMP-340-0000-6, "100 ohm Resistor Array 4 Element Concave 5%  1-16Watt 0804", Number of Resistors=4, Package / Case="0804, Concave, Long Side Terminals", Power=0.063W, Resistance=100, Tolerance (%)=±5%, Circuit Type=Isolated, Number of Pins=4, Part Name=RA-4-C-100-5%-0.063w-0804, Terminal Style="Long Side"
SPK1: library part CMP-00933-2, "BUZZER MAGNETIC 3V 3.2X3.2MM SMD", Current=120mA, Frequency=4kHz, Voltage=3V
SW1: library part CMP-00539-1, "SWITCH TACTILE SPST-NO 50MA 32V", Manufacturer="ITT C&K", Max Operating Temperature=85°C, Min Operating Temperature=-40°C, Operating Force=300gf, Actuator Type=Standard, Illumination Type=Non-Illuminated, Manufacturer Part Number="KMR631NG ULC LFS", Mechanical Life=150000Cycles, Mount="Surface Mount", Switch Function=Off-Mom, Termination="Gull Wing", Throw Configuration=SPST
TC1: "TC2030-MCP-NL", Manufacturer Part Number=TC2030-MCP-NL_SMALL
TVS1: library part CMP-01029-1, "TVS DIODE 43VWM 69.4VC DO214AB", Breakdown Voltage=47.8V, Case/Package=DO-214AB, Clamping Voltage=69.4V, Leakage Current=5uA, Max Operating Temperature=150°C, Max Surge Current=72.1A, Min Operating Temperature=-55°C, Operating Supply Voltage=43V, Package Quantity=3000, Peak Pulse Power=5kW, Power Line Protection=No, Test Current=1mA, Diode Type=ZENER, Min Breakdown Voltage=47.8V, Mounting Technology="Surface Mount", Number of Bidirectional Channels=1, Number of Channels=1, Number of Elements=1, Packaging="Tape and Reel", Peak Pulse Current=72.1A, Pins=2, Polarity=Bidirectional, Reverse Breakdown Voltage=47.8V, Reverse Standoff Voltage=43V, RoHS Compliant=Yes, Series=5.0SMDJ, Termination=SMD/SMT
TVS2 TVS6 TVS7: library part CMP-00666-2, "TVS DIODE 3.3V 10V DFN1006-2", RoHS Compliant=Yes
TVS3: library part CMP-00447-5, "TVS DIODE 3.3VWM 8VC SOD123W", Capacitance @ Frequency=-, Current - Peak Pulse (10/1000µs)=43.8A, Operating Temperature="-55°C ~ 150°C (TA)", Package / Case=SOD-123W, Power - Peak Pulse=400W, Power Line Protection=No, Supplier Device Package=SOD123W, Voltage - Breakdown (Min)=5.2V, Voltage - Clamping (Max) @ Ipp=8V, Voltage - Reverse Standoff (Typ)=3.3V, Applications=Automotive, Bidirectional Channels=-, Category="Circuit Protection", ComponentLink1Description=Datasheet, ComponentLink1URL=http://www.nxp.com/documents/data_sheet/PTVSXS1UR_SER.pdf, Lead Free Status / RoHS Status="RoHS Compliant", Mounting Type="Surface Mount", Type=Zener, Unidirectional Channels=1
TVS4: library part CMP-01080-1, "TVS DIODE 24VWM 37VC CAN SC703"
U1: library part CMP-01102-1, "IC MCU 32BIT 256KB FLSH 32UFQFPN", Case/Package=UFQFPN, Max Operating Temperature=85°C, Min Operating Temperature=-40°C, Core Architecture=ARM, Interface="CANbus, I2C, IrDA, LINbus, QSPI, SAI, SPI, SWPMI, UART/USART", Mounting Technology="Surface Mount", Number of I/Os=26, Oscillator Type=Internal, Peripherals="Brown-out Detect/Reset,PWM,WDT,DMA", RoHS Compliant=Yes, Series=STM32L4
U2: library part CMP-01078-3, "IC TRANSCEIVER HALF 1/1 8SON"
U4: library part CMP-01085-2, "3-V TO 65-V INPUT, 3V3 OUT, 300mA"
Y1: library part CMP-01104-1, "CRYSTAL 32.7680KHZ 9PF SMD", Frequency Stability=0.0072%, Frequency Tolerance=20ppm, Load Capacitance=9pF, Manufacturer Series=ABS05, Max Operating Temperature=85°C, Min Operating Temperature=-40°C, Operating Frequency-Nom=0.032768, Additional Feature="TAPE AND REEL", Crystal/Resonator Type="PARALLEL - FUNDAMENTAL", Drive Level=0.5uW, ESR=90kR, Mounting Technology="Surface Mount", Reach SVHC Compliant=Yes, RoHS Compliant=Yes

## Via types
v1: diameter 22, hole 12, L1 to L4, tented both sides, 201 vias
v2: diameter 24, hole 12, L1 to L4, tented both sides, 16 vias